# Altium PCB PCB1.PcbDoc
Units mil, origin at the board's own origin, x right, y up, seen from the top; angles counter-clockwise.
Board outline 7075 x 4930 mil, 2 copper layers (Top Layer, Bottom Layer); 67 components, 51 nets, 207 pads, 0 vias.
Unrouted connection lines stored in the file: 2.
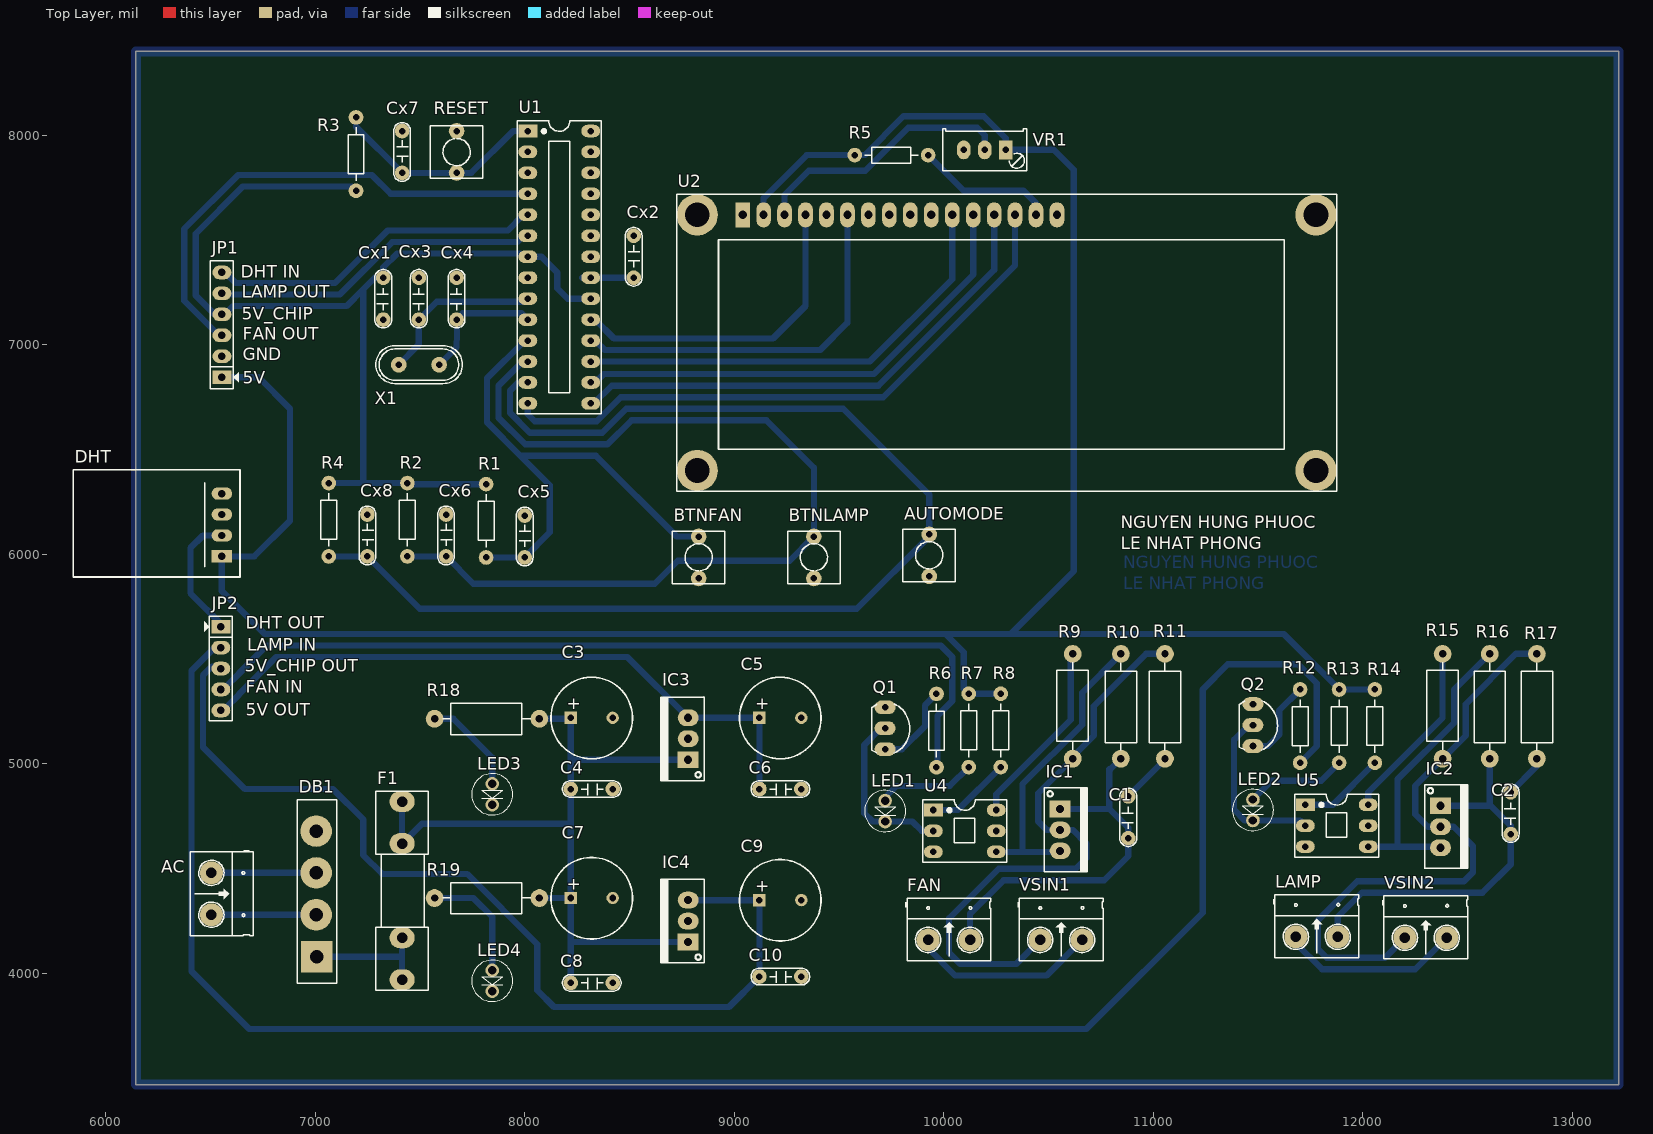
[diagram p0: Top Layer view]
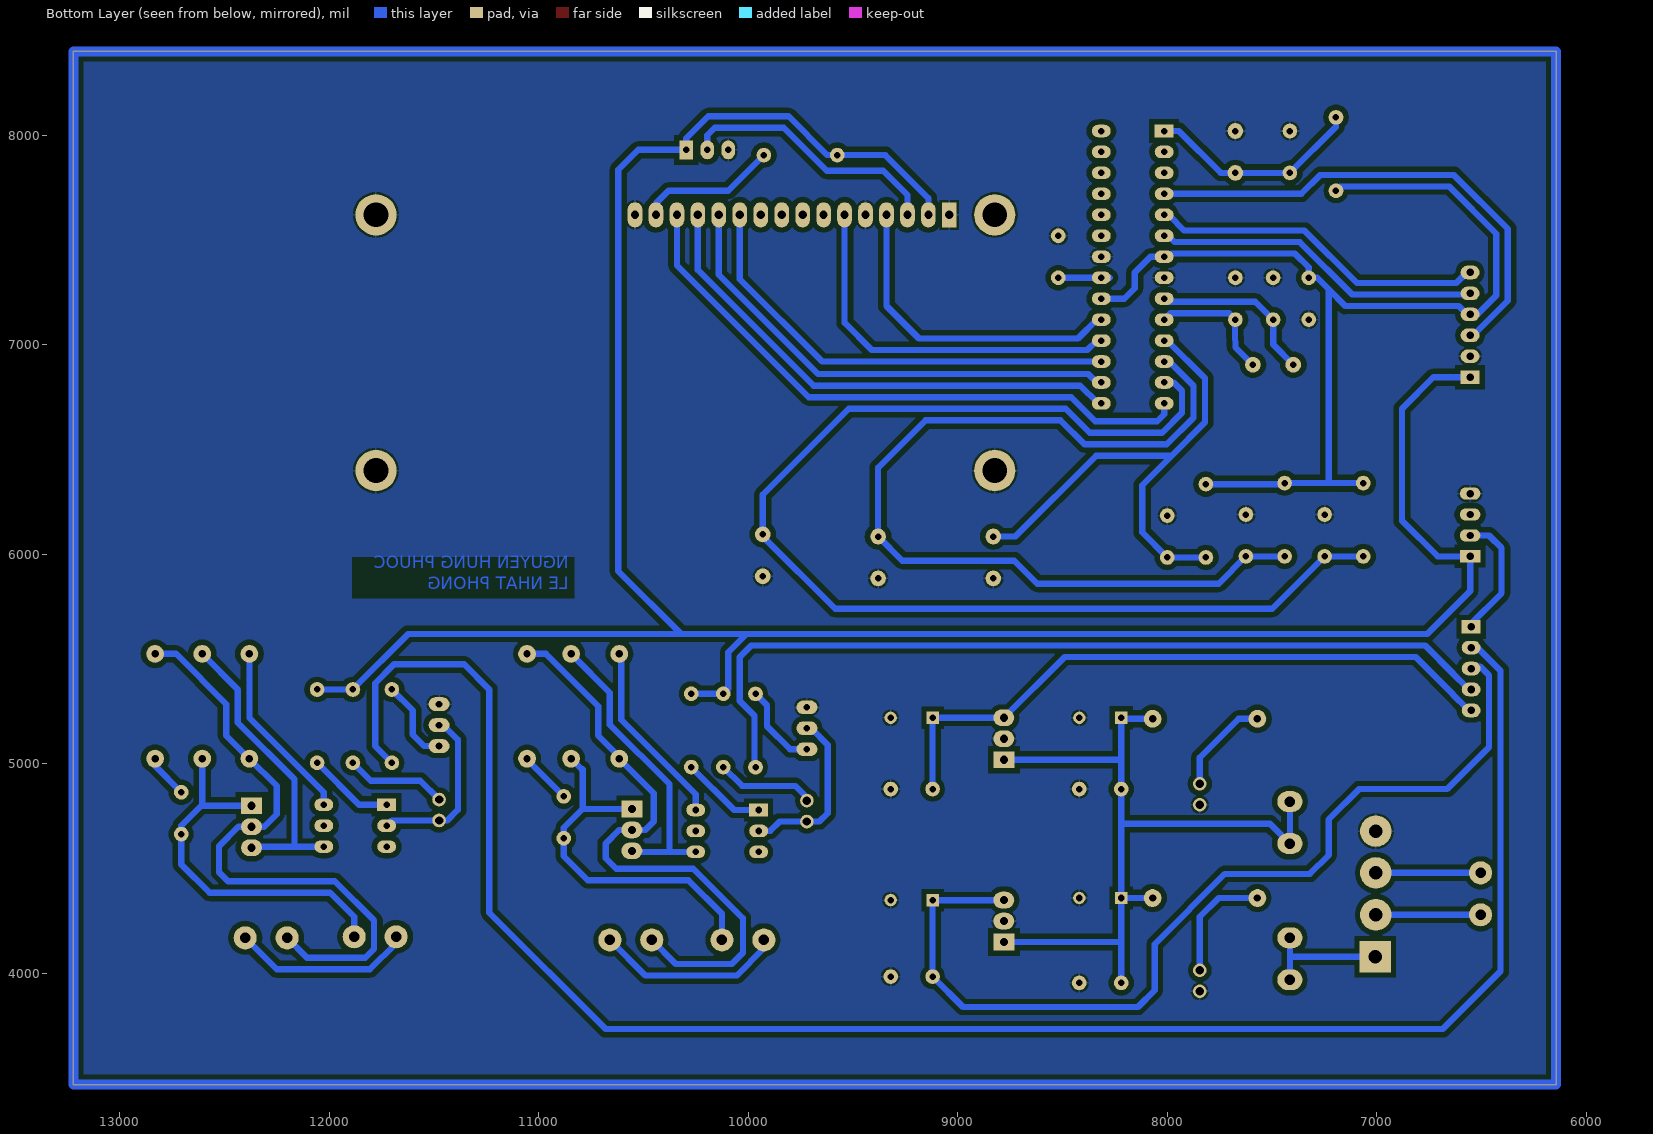
[diagram p1: Bottom Layer view, seen from below]
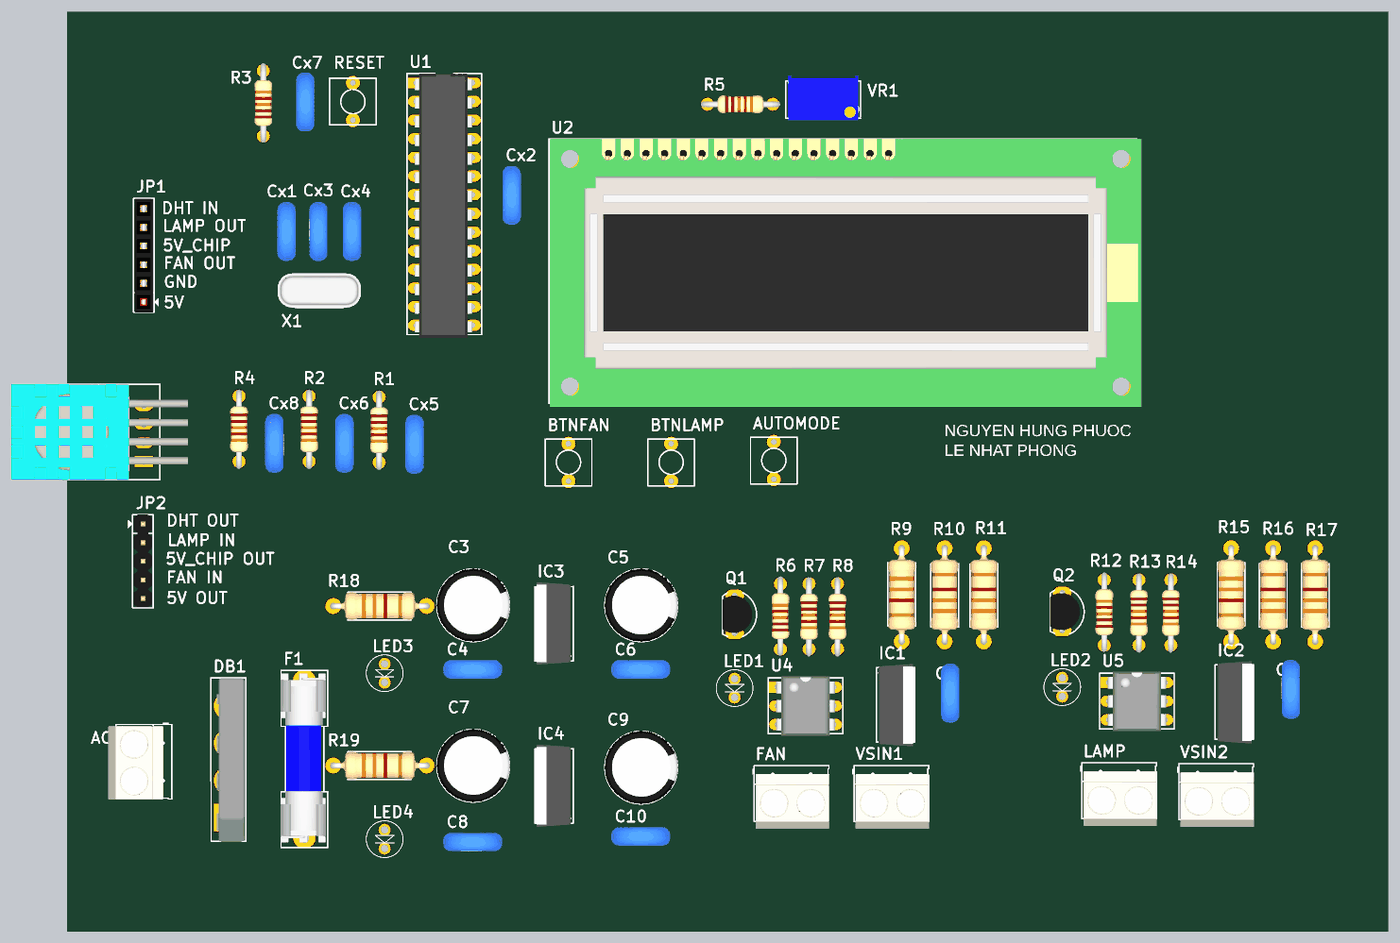
[diagram p2: 3D render of the assembled board from above, using the file's embedded part models]

## Layer stack, top to bottom
Top Solder: solder mask 0.4, Solder Resist, Dk 3.5
Top Layer: signal copper 1.4
Dielectric 1: dielectric 12.6, FR-4, Dk 4.8
Bottom Layer: signal copper 1.4
Bottom Solder: solder mask 0.4, Solder Resist, Dk 3.5

## Board outline
6145,3470 6145,8400 13220,8400 13220,3470

## Design rules (kind name [scope] priority, off if disabled: settings)
Clearance [All] p1: gap=25 ignorepadtopadclearanceinfootprint=FALSE
PolygonConnect [All] p1: connectstyle=Relief reliefconductorwidth=10 reliefentries=4 polygonreliefangle="90 Angle" airgapwidth=10
RoutingVias [All] p1: holewidth=28 width=50 viastyle="Through Hole" minholewidth=28 minwidth=50 maxholewidth=28 maxwidth=50
SolderMaskExpansion [All] p1: expansion=4
Width [All] p1: maxlimit=45 minlimit=15 preferedwidth=30
30 further rules are at their usual default settings.

## Components (designator, comment, footprint, x,y, rotation, side; value= is the part's Value field where it differs from the comment)
AC "Header 2_1" HED2 6505,4480 r270 top value="Header 2"
AUTOMODE "SW" SW2 9930,6095 r270 top value="SW chip 2 pin"
BTNFAN "SW" SW2 8830,6085 r270 top value="SW chip 2 pin"
BTNLAMP "SW" SW2 9380,6085 r270 top value="SW chip 2 pin"
C1 "104" CN2 10880,4645 r90 top value=0.1uF
C2 "104" CN2 12705,4665 r90 top value=0.1uF
C3 "1000uF" C10mm 8320,5220 r0 top
C4 "104" CN2 8420,4880 r180 top value=0.1uF
C5 "1000uF" C10mm 9220,5220 r0 top
C6 "104" CN2 9320,4880 r180 top value=0.1uF
C7 "1000uF" C10mm 8320,4360 r0 top
C8 "104" CN2 8420,3955 r180 top value=0.1uF
C9 "1000uF" C10mm 9220,4350 r0 top
C10 "104" CN2 9320,3985 r180 top value=0.1uF
Cx1 "104" CN2 7325,7120 r90 top value=0.1uF
Cx2 "104" CN2 8520,7520 r270 top value=0.1uF
Cx3 "22pF" CN2 7495,7120 r90 top value=0.1uF
Cx4 "22pF" CN2 7675,7120 r90 top value=0.1uF
Cx5 "104" CN2 8000,6185 r270 top value=0.1uF
Cx6 "104" CN2 7624.69,6190 r270 top value=0.1uF
Cx7 "104" CN2 7415,8020 r270 top value=0.1uF
Cx8 "104" CN2 7249.38,6190 r270 top value=0.1uF
DB1 "Diode Brideg" "DIO-Bri 5A" 7005,4080 r90 top value="Cau 1A"
DHT "DHT11" DHT11 6555,5990 r180 top
F1 "F1A" Fuse 7415,4395 r90 top value=Fuse
FAN "Header 2_1" HED2 9925,4160 r0 top value="Header 2"
IC1 "BT137" QTO-220 10555,4785 r270 top value=LM317
IC2 "BT137" QTO-220 12370,4800 r270 top value=LM317
IC3 "LM7805" QTO-220 8780,5020 r90 top
IC4 "LM7805" QTO-220 8780,4150 r90 top
JP1 "JP6 PIN" JP6_1 6555,6845 r90 top value=JP7
JP2 "JP5 PIN" JP5 6550,5655 r270 top value=JP5
LAMP "Header 2_1" HED2 11680,4175 r0 top value="Header 2"
LED1 "LED" LED-5MM-WHITE 9720,4825 r270 top value="LED 3 ly Single Colour"
LED2 "LED" LED-5MM-WHITE 11475,4830 r270 top value="LED 3 ly Single Colour"
LED3 "LED" LED-5MM-YELLOW 7845,4905 r270 top value="LED 3 ly Single Colour"
LED4 "LED" LED-5MM-YELLOW 7845,4015 r270 top value="LED 3 ly Single Colour"
Q1 "C1815" QTO-92 9720,5170 r270 top
Q2 "C1815" QTO-92 11475,5185 r270 top
R1 "Res1" R1/4W 7815.62,5985 r90 top value=10k
R2 "Res1" R1/4W 7440.31,5990 r90 top value=10k
R3 "Res1" R1/4W 7195,8085 r270 top value=10k
R4 "Res1" R1/4W 7065,5990 r90 top value=10k
R5 "Res1" R1/4W 9925,7905 r180 top value=560
R6 "Res1" R1/4W 9965,5334 r270 top value=1k
R7 "Res1" R1/4W 10118.49,4984.6 r90 top value=1k
R8 "Res1" R1/4W 10271.49,4984.6 r90 top value=220
R9 "220" RES-1W 10615,5265 r90 top
R10 "330" RES-1W 10845,5285 r270 top
R11 "39" RES-1W 11055,5285 r270 top
R12 "Res1" R1/4W 11700,5355 r270 top value=1k
R13 "Res1" R1/4W 11886,5005 r90 top value=1k
R14 "Res1" R1/4W 12057,5005 r90 top value=220
R15 "220" RES-1W 12380,5265 r90 top
R16 "330" RES-1W 12605,5285 r270 top
R17 "39" RES-1W 12830,5285 r270 top
R18 "Res" RES-1W 7830,5215 r180 top
R19 "Res" RES-1W 7830,4360 r180 top
RESET "SW" SW2 7675,7820 r90 top value="SW chip 2 pin"
U1 "ATmega328-PU" DIP28 8015,8020 r270 top
U2 "LCD" LCD16X2 9040,7620 r0 top value=LCD16x2
U4 "MOC3021" DIP6 10110,4675 r270 top
U5 "MOC3021" DIP6 11885,4700 r270 top
VR1 "10K" VR1 10295,7930 r180 top value="VR 10K"
VSIN1 "Header 2_1" HED2 10460,4160 r0 top value="Header 2"
VSIN2 "Header 2_1" HED2 12200,4170 r0 top value="Header 2"
X1 "16Mhz" CRYSTAL 7495,6905 r180 top value=4Mhz

## Footprints (in the part's own frame and the unit in brackets; to place one, negate y for a bottom-side part, rotate by r counter-clockwise, add the part's x,y. Pads: shape width x height; smd on the part's side, far side on the other; paste and mask are expansions set on the pad)
C10mm [mm]
  rect 1.5x1.5 hole 0.8: 1(-2.54,0)
  round 1.5 hole 0.8: 2(2.54,0)
  silkscreen extent -4.95,-4.96 4.93,4.92, body extent -5,-5 4.97,5, height 20.01
CN2 [mil]
  round 70 hole 31: 1(0,0) 2(200,0)
  silkscreen extent -40,-40 240,40, body extent -54,-44 260,55, height 407
CRYSTAL [mm]
  round 1.905 hole 0.8: 1(-2.45,0) 2(2.45,0)
  silkscreen extent -5.28,-2.29 5.21,2.29, body extent -5.68,-2.36 5.68,2.29, height 3.5
DHT11 [mm]
  rect 2.5x1.5 hole 0.9: 1(0,0)
  oval 2.5x1.5 hole 0.9: 2(0,-2.54) 3(0,-5.08) 4(0,-7.62)
  silkscreen extent -2.2,-10.5 18,2.5, body extent -6,-10.5 18,2.5, height 6
"DIO-Bri 5A" [mil] "Brigde 5A"
  rect 150x150 hole 65: 1(0,-2)
  round 150 hole 65: 2(200,0) 3(400,0) 4(599,0)
  silkscreen extent -127,-97 750,90, body extent -129,-90 749,58, height 937
DIP6 [mil]
  rect 60x90 hole 31.5: 1(-105,-160)
  oval 60x90 hole 31.5: 2(-5,-160) 3(95,-160) 4(95,140) 5(-5,140) 6(-105,140)
  silkscreen extent -155,-210 145,190, body extent -163,-167 155,147, height 170
DIP28 [mil] "DIP, 18-Leads, Row Spacing 7.62mm, Pitch 2.54mm, Body 22.8x7.3mm, Window"
  rect 60x90 hole 31: 1(0,0)
  oval 60x90 hole 31: 2(100,0) 3(200,0) 4(300,0) 5(400,0) 6(500,0) 7(600,0) 8(700,0) 9(800,0) 10(900,0) 11(1000,0) 12(1100,0) 13(1200,0) 14(1300,0) 15(1300,300) 16(1200,300) 17(1100,300) 18(1000,300) 19(900,300) 20(800,300) 21(700,300) 22(600,300) 23(500,300) 24(400,300) 25(300,300) 26(200,300) 27(100,300) 28(0,300)
  silkscreen extent -50,-50 1350,350, body extent -50,-10 1367,300, height 200
Fuse [mil] "De Fuse"
  oval 100x120 hole 50: 1(-425,0) 1(-225,0) 2(225,0) 2(425,0)
  silkscreen extent -475,-125 475,125, body extent -448,-117 459,127, height 378
HED2 [mil] "Header 2, 2 pin, hight 300mil, Pin to Pin 200, Colour Green"
  round 110 hole 50: 1(0,0) 2(200,0)
  silkscreen extent -106,-100 300,200, body extent -92,-140 302,155, height 394
JP5 [mil] "JP5"
  rect 65x90 hole 36: 1(0,0)
  oval 65x90 hole 36: 2(100,0) 3(200,0) 4(300,0) 5(400,0)
  silkscreen extent -50,-80 450,55, body extent -50,-49 446,49, height 354
JP6_1 [mil] "JP6"
  rect 65x90 hole 36: 1(0,0)
  oval 65x90 hole 36: 2(100,0) 3(200,0) 4(300,0) 5(400,0) 6(500,0)
  silkscreen extent -55,-80 556,55, body extent -55,-48 555,50, height 366
LCD16X2 [mm] "LCD dipslay 16x2, 16 pin"
  round 5 hole 3: 1(-5.5,-31) 1(-5.5,0) 1(69.5,-31) 1(69.5,0)
  rect 1.778x3.048 hole 1: 1(0,0)
  oval 1.778x3.048 hole 1: 2(2.54,0) 3(5.08,0) 4(7.62,0) 5(10.16,0) 6(12.7,0) 7(15.24,0) 8(17.78,0) 9(20.32,0) 10(22.86,0) 11(25.4,0) 12(27.94,0) 13(30.48,0) 14(33.02,0) 15(35.56,0) 16(38.1,0)
  round 0 all layers, no hole: ""(-5.5,0)
  silkscreen extent -8,-33.5 72,2.5, body extent -7.87,-33.96 72.64,2.54, height 18.14
LED-5MM-WHITE [mil]
  round 65 hole 40: 1(0,0) 2(100,0)
  silkscreen extent -48,-98 148,98, body extent -54,-105 155,105, height 370
LED-5MM-YELLOW [mil]
  round 65 hole 40: 1(0,0) 2(100,0)
  silkscreen extent -48,-98 148,98, body extent -54,-105 155,105, height 370
QTO-92 [mil] "TO-92"
  oval 66x100 hole 32: 1(-100,0) 2(0,0) 3(100,0)
  silkscreen extent -117,-65 120,118, body extent -109,-66 109,95, height 245
QTO-220 [mil] "TO-220 - 1-2-3"
  rect 80x100 hole 39: 1(0,0)
  oval 80x100 hole 39: 2(100,0) 3(200,0)
  silkscreen extent -100,-76 300,130, body extent -119,-64 322,121, height 755
R1/4W [mil] "R 1/4W, 2 Pin, 350mil"
  round 70 hole 31: 1(0,0) 2(350,0)
  silkscreen extent 48,-38 302,38, body extent -40,-47 386,47, height 111
RES-1W [mil]
  round 85 hole 35: 1(-240,0) 2(260,0)
  silkscreen extent -198,-74 221,75, body extent -255,-74 275,74, height 189
SW2 [mil] "SW button 2pin, 250x 250 mil"
  round 75 hole 31: 1(0,0) 2(200,0)
  silkscreen extent -25,-125 225,125
VR1 [mil] "Variable Resistor"
  rect 65x90 hole 30: 1(0,0)
  oval 65x90 hole 30: 2(100,0) 3(200,0)
  silkscreen extent -100,-100 301,100, body extent -88,-130 288,110, height 455

## Part data
AC FAN LAMP VSIN1 VSIN2: "Header, 2-Pin", Manufacturer="Generic Components", Class=Connector
AUTOMODE BTNFAN BTNLAMP RESET: library part SW2, "Switch button 2 pin"
C1 C2 C4 C6 C8 C10 Cx1 Cx2 Cx3 Cx4 Cx5 Cx6 Cx7 Cx8: library part CN2, "Cap np 104 => 105pF"
C3 C5 C7 C9: library part "Cap Pol", "Polarized Capacitor (Axial)", LatestRevisionDate=17-Jul-2002, LatestRevisionNote="Re-released for DXP Platform.", PackageReference=POLAR0.8, Published=8-Jun-2000, Publisher="Altium Limited"
DB1: library part "DIODE BRIGDE", "Convert AC to DC voltage, 4 pin", ="Cau 5A"
DHT: library part DHT11_1, "Size: 15mm x 12mm x 5.5mm.", WEB=TECHMT.VN
F1: library part Fuse, "Fuse", Designed by=VanDungEvn
IC1 IC2: "Triacs - 8A"
IC3 IC4: library part LM78xx, "On ap +, from + 5 to + 24VDC", =LM7808
JP1: library part JP6
JP2: library part JP5
LED1 LED2 LED3 LED4: "LED Single colour Green and Red"
Q1 Q2: "NPN 600mW, ECB", =C2383
R1 R2 R3 R4 R5 R6 R7 R8 R12 R13 R14: library part Res1_1, "Resistor", Manufacturer="Generic Components", Class=Passive, Published=08/06/2000, Publisher="Altium Hobart Technology Centre", SubClass=Resistor
R9 R10 R11 R15 R16 R17: library part Res, "Res", Manufacturer="Generic Components", Class=Passive, Published=08/06/2000, Publisher="Altium Hobart Technology Centre", SubClass=R
R18 R19: Manufacturer="Generic Components", Class=Passive, Published=08/06/2000, Publisher="Altium Hobart Technology Centre", SubClass=R
U1: "8-bit AVR Microcontroller, 32KB Flash, 1KB EEPROM, 2KB SRAM, 28-pin PDIP, Industrial Grade (-40°C to 85°C)", Supplier Part Number 1=ATMEGA328-PU-ND, ComponentLink1Description="Manufacturer Link", ComponentLink1URL=http://www.atmel.com/products/avr/default.asp?, ComponentLink2Description="ATmega48A/48PA/88A/88PA/168A/168PA/328/328P Datasheet", ComponentLink2URL=http://www.atmel.com/dyn/resources/prod_documents/8271.pdf, ComponentLink3Description="ATmega48A/48PA/88A/88PA/168A/168PA/328/328P Summary", ComponentLink3URL=http://www.atmel.com/dyn/resources/prod_documents/8271S.pdf, ComponentLink4Description="Atmel.com Home", ComponentLink4URL=http://www.atmel.com, DatasheetVersion="revA, Jan-2010", PackageDescription="28-lead (0.300\"/7.62mm Wide) Plastic Dual Inline Package (PDIP)", PackageReference=28P3, PackageVersion="revB, Sep-2001", Published=1-Apr-2010, Publisher="Altium Limited", Supplier 1=Digi-Key, Supplier 2=Mouser, Supplier Part Number 2=556-ATMEGA328-PU
U4 U5: "Single Opto"
VR1: library part "Var Resitor", "Var Resistor"
X1: library part CRYSTAL, "Crystal For all Crystal 2pin."

## Nets (pads, with @x,y where several pads share a name; then routed paths per layer and width w, separated by ;. In a path a pad name is that pad's centre, name@x,y a point inside that pad or via, vN(x,y) a via of type N, cw(c..) or ccw(c..) an arc to the next point about the centre after c; other vN are vias at no path point)
4: U1.17 U2.11 | length 2195
  Bottom Layer w30: U1.17 9647.43,6920 10040,7312.57 U2.11
5: U1.16 U2.12 | length 2323.4
  Bottom Layer w30: U1.16 8336.07,6820 8376.07,6860 9665.21,6860 10140,7334.79 U2.12
5V: DHT.1 JP1.1 R5.2 R7.2 R8.2 R13.2 R14.2 U2.2 VR1.1 | length 11859.9
  Bottom Layer w30: JP1.1 6730,6845 6880,6695 6880,6160 6710,5990 DHT.1 6555,5825 6760,5620 10320,5620 ; U2.2 9140,7699.85 9345.15,7905 R5.2 9622.22,7905 9807.22,8090 10190,8090 10295,7985 VR1.1 10525,7930 10620,7835 10620,5920 10320,5620 ; 10010,5617.78 10095,5532.78 10095,5358.09 R7.2 R8.2 ; R14.2 R13.2 11886,5356.78 11622.78,5620 10320,5620
5V_CHIP: Cx1.2 JP1.4 R1.2 R2.2 R3.2 R4.2 U1.7 U1.20 | length 4996.9
  Bottom Layer w30: R4.2 7225,6340 ; R3.2 7175,7755 6655,7755 6430,7530 6430,7235 6520,7145 JP1.4 6570.03,7145 6610.03,7185 7150,7185 7230,7265 ; R1.2 7445.31,6335 R2.2 7230,6340 7230,7265 ; U1.7@7979.64,7435 7390.71,7435 7325,7369.29 Cx1.2 7285,7320 7230,7265 ; U1.7 8080,7420 8155,7345 8155,7270 8205,7220 U1.20
5V_CHIPOUT: C9.1 C10.2 IC4.3 JP2.3 | length 4612.1
  Bottom Layer w30: JP2.3@6555,5465 6507.78,5465 6465,5422.22 6465,5080 6665,4880 7085,4880 7230,4735 7230,4565 7320,4475 7725,4475 8060,4140 8060,3920 8140,3840 8975,3840 C10.2 C9.1 IC4.3
5VOUT: C5.1 C6.2 IC3.3 JP2.5 | length 3127.3
  Bottom Layer w30: JP2.5@6555,5265 6571.11,5265 6636.5,5330.39 6636.5,5331.5 6815,5510 8490,5510 IC3.3 C5.1 C6.2
6: U1.15 U2.13 | length 2451.8
  Bottom Layer w30: U1.15 8330,6720 8415,6805 9687.99,6805 10240,7357.01 U2.13
7: U1.14 U2.14 | length 2939.8
  Bottom Layer w30: U1.14 8015,6667.78 8047.78,6635 8343.99,6635 8458.99,6750 9710.77,6750 10340,7379.23 U2.14
AUTO: AUTOMODE.1 Cx8.2 R4.1 U1.13 | length 5774.8
  Bottom Layer w30: R4.1 Cx8.2 7499.38,5740 9585,5740 9930,6085 9930,6285 9520,6695 8485,6695 8370,6580 8025,6580 7930,6675 7930,6780 7970,6820 U1.13
BTNFAN: BTNFAN.1 Cx5.2 R1.1 U1.11 | length 2492.9
  Bottom Layer w30: R1.1 Cx5.2 8120,6105 8120,6329.44 7979.44,6470 ; U1.11 8000,7020 7820,6840 7820,6629.44 7979.44,6470 ; BTNFAN.1 8725,6085 8340,6470 7979.44,6470
BTNLAMP: BTNLAMP.1 Cx6.2 R2.1 U1.12 | length 4454.8
  Bottom Layer w30: R2.1 Cx6.2 7754.69,5860 8620,5860 8730,5970 9265,5970 BTNLAMP.1 9380,6413.46 9153.46,6640 8510,6640 8395,6525 8002.22,6525 7875,6652.22 7875,6805 7990,6920 U1.12
DHT: DHT.2 JP1.6 JP2.1 U1.5 | length 2217.3
  Bottom Layer w30: JP2.1@6555,5665 6405,5815 6405,6030 6465,6090 DHT.2 ; JP1.6 6570.03,7345 6620.03,7295 7095.15,7295 7345.15,7545 7918.93,7545 7993.93,7620 U1.5
EN: U1.18 U2.6 | length 1812.5
  Bottom Layer w30: U1.18 8336.07,7020 8381.07,6975 9410,6975 9540,7105 U2.6
FAN: JP1.3 U1.4 | length 2375
  Bottom Layer w30: JP1.3 6539.97,7045 6375,7209.97 6375,7552.78 6632.22,7810 7270,7810 7360,7720 U1.4
"FAN IN": JP2.4 R6.2 | length 4148.3
  Bottom Layer w30: JP2.4@6555,5365 6571.11,5365 6636.5,5430.39 6636.5,5431.5 6770,5565 9985,5565 10040,5510 10040,5300.01 9970,5230.01 9970,4989 R6.2
GND: AUTOMODE.2 BTNFAN.2 BTNLAMP.2 C3.2 C4.1 C5.2 C6.1 C7.2 C8.1 C9.2 C10.1 Cx1.1 Cx2.1 Cx3.2 Cx4.2 Cx5.1 Cx6.1 Cx7.1 Cx8.1 DB1.4 DHT.4 IC3.2 IC4.2 JP1.2 LED3.2 LED4.2 Q1.1 Q2.1 RESET.2 U1.8 U1.22 U2.1 U2.5 U2.16 VR1.3
LAMP: JP1.5 U1.6 | length 1545.6
  Bottom Layer w30: JP1.5@6587.5,7245 6592.5,7240 7117.93,7240 7367.93,7490 7963.93,7490 7993.93,7520 U1.6
"LAMP IN": JP2.2 R12.2 | length 8908.6
  Bottom Layer w30: JP2.2@6555,5565 6530,5565 6410,5445 6410,4010 6685,3735 10680,3735 11235,4290 11235,5355 11355,5475 11690,5475 11780,5385 11780,5085 R12.2
NetAC_1: AC.1 DB1.3 | length 500
  Bottom Layer w30: AC.1 DB1.3
NetAC_2: AC.2 DB1.2 | length 500
  Bottom Layer w30: AC.2 DB1.2
NetC1_1: C1.1 FAN.2 IC1.1 R10.2 | length 1751.9
  Bottom Layer w30: FAN.2 10125,4285 10285,4445 10765,4445 10880,4560 C1.1 10880,4695 10790,4785 ; IC1.1 10790,4785 ; 10790,4975 10790,4785 ; 10795,4975 R10.2
NetC1_2: C1.2 R11.2 | length 252.5
  Bottom Layer w30: C1.2 11055,5020 R11.2
NetC2_1: C2.1 IC2.1 LAMP.2 R16.2 | length 1810
  Bottom Layer w30: LAMP.2 11880,4270 11995,4385 12570,4385 12705,4520 C2.1 12705,4705 12610,4800 ; IC2.1 12610,4800 ; R16.2 12605,4805 12610,4800
NetC2_2: C2.2 R17.2 | length 211.8
  Bottom Layer w30: C2.2 12830,4990 R17.2
NetC3_1: C3.1 C4.2 C7.1 C8.2 F1.2 IC3.1 IC4.1 R18.1 R19.1 | length 3721.4
  Bottom Layer w30: F1.2@7415,4820 7415,4620 7510,4715 8220,4715 ; R19.1 C7.1 ; R18.1 8215,5215 C3.1 C4.2 8220,4715 ; C8.2 C7.1 ; 8225,4150 IC4.1 ; 8225,5020 IC3.1 ; C7.1 8220,4715
NetCx2_2: Cx2.2 U1.21 | length 245
  Bottom Layer w30: U1.21@8275,7320 U1.21 Cx2.2
NetCx3_1: Cx3.1 U1.9 X1.2 | length 816.4
  Bottom Layer w30: X1.2 7495,7001.46 Cx3.1 7580,7205 8000,7205 U1.9
NetCx4_1: Cx4.1 U1.10 X1.1 | length 629.5
  Bottom Layer w30: X1.1 7675,6988.54 7679.48,7119.85 Cx4.1@7679.65,7124.65 ; Cx4.1 Cx4.1@7679.65,7124.65 ; Cx4.1@7680,7135 Cx4.1@7679.65,7124.65 ; U1.10 7985,7150 7705,7150 Cx4.1@7679.65,7124.65
NetDB1_1: DB1.1 F1.1 | length 610.1
  Bottom Layer w30: DB1.1 7410,4080 7415,4075 ; F1.1@7415,3970 7415,4075 ; F1.1@7415,4170 7415,4075
NetFAN_1: FAN.1 VSIN1.2 | length 899.3
  Bottom Layer w30: FAN.1 9925,4120 10055,3990 10490,3990 VSIN1.2
NetIC1_2: IC1.2 R9.1 R11.1 VSIN1.1 | length 2890.3
  Bottom Layer w30: VSIN1.1 10345,4045 10077.78,4045 10025,4097.78 10025,4262.78 10262.22,4500 10630,4500 10680,4550 10680,4620 10615,4685 IC1.2 10490,4685 10450,4725 10450,4860 R9.1 10615,5035 10715,5135 10715,5275 10965,5525 R11.1
NetIC1_3: IC1.3 R10.1 U4.4 | length 1458.7
  Bottom Layer w30: U4.4 10375,4580 ; IC1.3@10538.93,4585 IC1.3 10550,4580 10375,4580 ; R10.1@10835,5525 10835,5515 10660,5340 10660,5187.22 10375,4902.22 10375,4580
NetIC2_2: IC2.2 R15.1 R17.1 VSIN2.1 | length 2968.9
  Bottom Layer w30: VSIN2.1 12105,4075 11827.78,4075 11785,4117.78 11785,4252.78 11972.22,4440 12482.22,4440 12525,4482.78 12525,4607.33 12432.33,4700 IC2.2 12310,4700 12250,4760 12250,4895 R15.1 12490,5135 12490,5285 12730,5525 R17.1
NetIC2_3: IC2.3 R16.1 U5.4 | length 1449.3
  Bottom Layer w30: U5.4 12165,4605 ; IC2.3 12365,4605 12165,4605 ; R16.1 12435,5355 12435,5197.22 12165,4927.22 12165,4605
NetLAMP_1: LAMP.1 VSIN2.2 | length 863.9
  Bottom Layer w30: LAMP.1 11680,4145 11805,4020 12250,4020 VSIN2.2
NetLED1_1: LED1.1 R7.1 | length 473.4
  Bottom Layer w30: LED1.1 9720,4840 9775,4895 10028.89,4895 R7.1
NetLED1_2: LED1.2 Q1.2 U4.2 | length 823.5
  Bottom Layer w30: Q1.2 9699.76,5170 9620,5090.24 9620,4765 9660,4725 LED1.2 9850,4725 9895,4680 U4.2
NetLED2_1: LED2.1 R13.1 | length 483.5
  Bottom Layer w30: LED2.1 11565,4920 11801,4920 R13.1
NetLED2_2: LED2.2 Q2.2 U5.2 | length 824.7
  Bottom Layer w30: Q2.2 11454.76,5185 11385,5115.24 11385,4780.93 11435.93,4730 LED2.2 11700,4730 U5.2
NetLED3_1: LED3.1 R18.2 | length 476.6
  Bottom Layer w30: R18.2 7660,5215 7845,5030 LED3.1
NetLED4_1: LED4.1 R19.2 | length 567.3
  Bottom Layer w30: R19.2 7755,4360 7845,4270 LED4.1
NetQ1_3: Q1.3 R6.1 | length 412.3
  Bottom Layer w30: Q1.3 9800,5070 9910,5180 9910,5279 R6.1
NetQ2_3: Q2.3 R12.1 | length 404.2
  Bottom Layer w30: Q2.3 11545,5085 11600,5140 11600,5255 R12.1
NetR5_1: R5.1 U2.15 | length 665.3
  Bottom Layer w30: R5.1 10095,7735 10380,7735 10440,7675 U2.15
NetR8_1: R8.1 U4.1 | length 406.2
  Bottom Layer w30: U4.1 10066.89,4780 R8.1
NetR9_2: R9.2 U4.6 | length 892
  Bottom Layer w30: U4.6 10250,4855 10605,5210 R9.2@10605,5525
NetR14_1: R14.1 U5.1 | length 414.8
  Bottom Layer w30: U5.1 11857,4805 R14.1
NetR15_2: R15.2 U5.6 | length 867
  Bottom Layer w30: U5.6 12025,4865 12380,5220 R15.2
NetU2_3: U2.3 VR1.2 | length 1282
  Bottom Layer w30: U2.3 9240,7715 9355,7830 9625,7830 9830,8035 10160,8035 10195,8000 VR1.2 VR1.2@10195,7915
RESET: Cx7.2 R3.1 RESET.1 U1.1 | length 1039
  Bottom Layer w30: R3.1 7195,8040 Cx7.2 RESET.1 7745,7820 7945,8020 U1.1
RS: U1.19 U2.4 | length 1561.5
  Bottom Layer w30: U1.19 8336.07,7120 8426.07,7030 9185,7030 9340,7185 U2.4
pads on no net: DHT.3 U1.2 U1.3 U1.23 U1.24 U1.25 U1.26 U1.27 U1.28 U2. U2.7 U2.8 U2.9 U2.10 U4.3 U4.5 U5.3 U5.5
copper on no net: | length 24010
  Bottom Layer w47.24: 6145,3470 13220,3470 13220,8400 6145,8400 6145,3470

## Polygon pours and split planes (outlines as drawn)
GND on Bottom Layer "GND_L02_P005" (solid, pour order 5): 6145,3470 6145,8400 13220,8400 13220,3470

## Other copper
Bottom Layer:
  text "NGUYEN HUNG PHUOC / LE NHAT PHONG" at 10855,5815 h100

## Silkscreen, mask and mechanical layers (free items; w line width, h text height)
Top Overlay:
  text "DHT IN" at 6645,7320 h60
  text "LAMP OUT" at 6650,7225 h60
  text "5V_CHIP" at 6650,7120 h60
  text "FAN OUT" at 6655,7025 h60
  text "GND" at 6655,6925 h60
  text "5V" at 6655,6815 h60
  text "NGUYEN HUNG PHUOC / LE NHAT PHONG" at 10845,6005 h100
  text "DHT OUT" at 6670,5645 h60
  text "LAMP IN" at 6675,5540 h60
  text "5V_CHIP OUT" at 6665,5440 h60
  text "FAN IN" at 6670,5340 h60
  text "5V OUT" at 6670,5230 h60

## Text inside footprints (layer, text, board x,y; h text height)
C3: Top Overlay "+" at 8200,5260 h60
C5: Top Overlay "+" at 9100,5260 h60
C7: Top Overlay "+" at 8200,4400 h60
C9: Top Overlay "+" at 9100,4390 h60